# Altium PCB ui-board.PcbDoc
Units mm, origin at the board's own origin, x right, y up, seen from the top; angles counter-clockwise.
Board outline 30.5 x 20 mm, 4 copper layers (Top Layer, Int1 (GND), Int2 (PWR), Bottom Layer), stack 1.369 mm thick; 13 components, 8 nets, 46 pads, 16 vias.
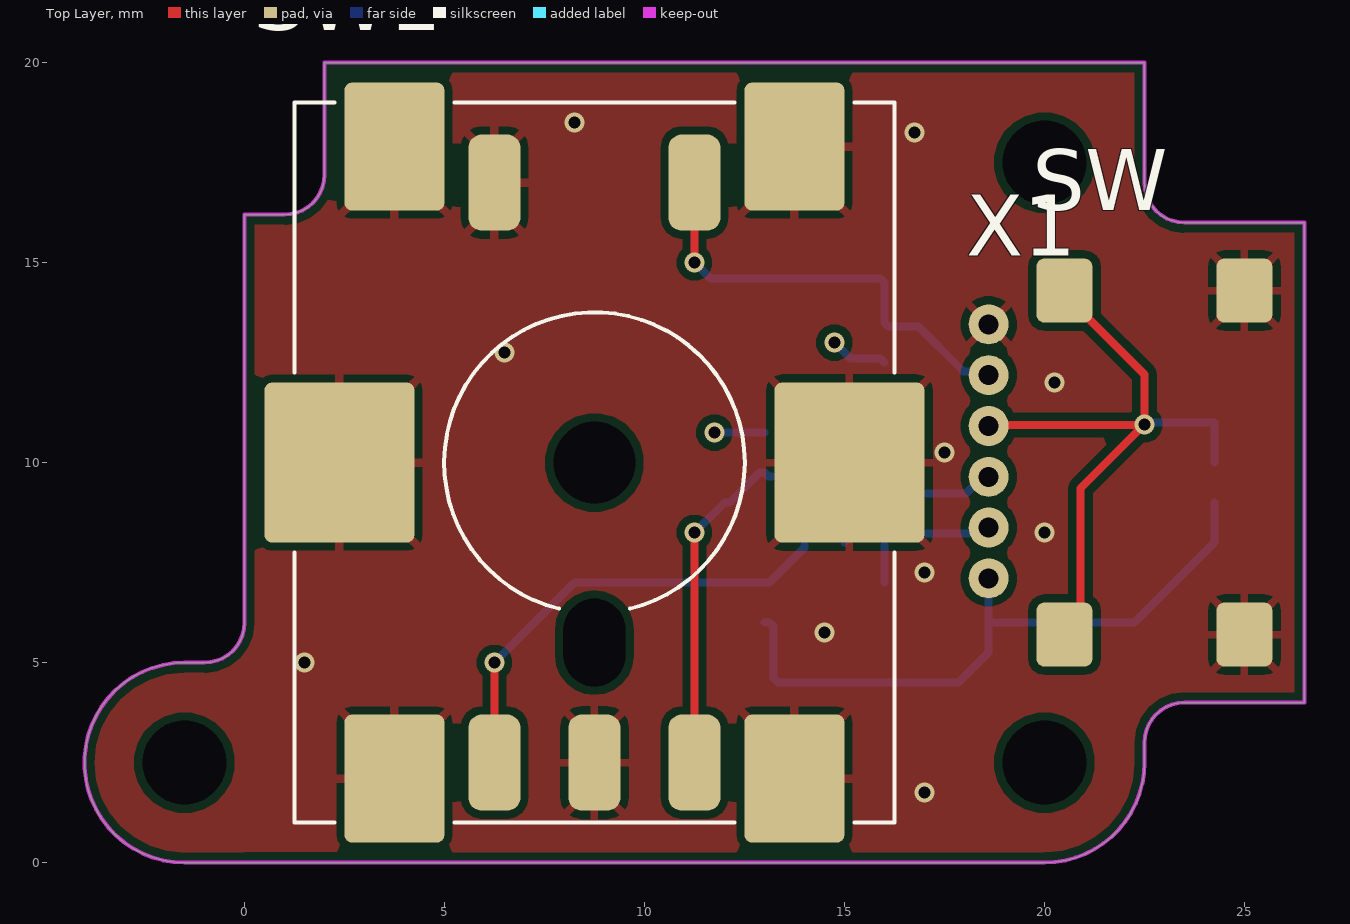
[diagram p0: Top Layer view]
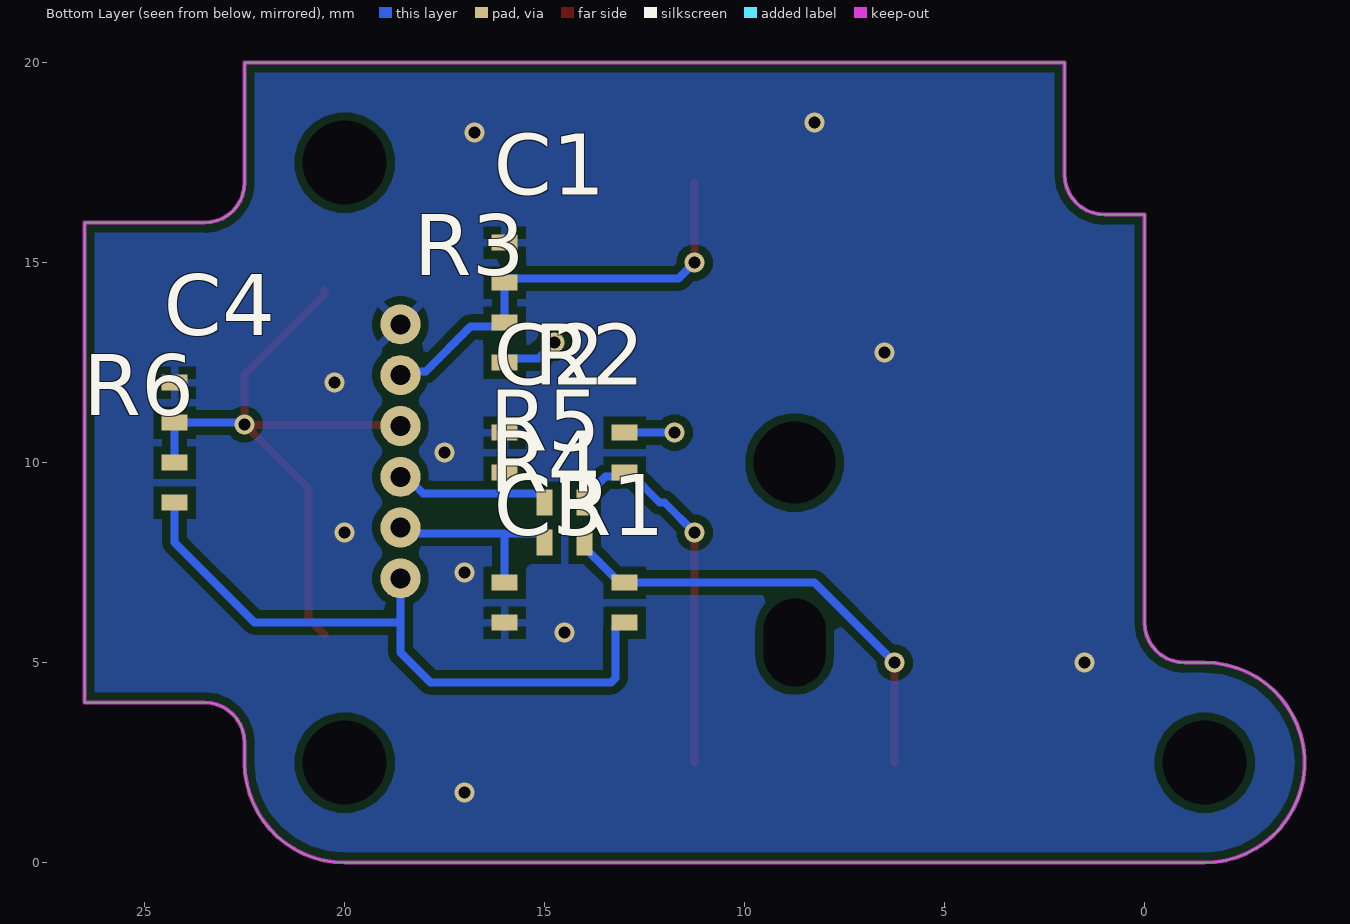
[diagram p1: Bottom Layer view, seen from below]
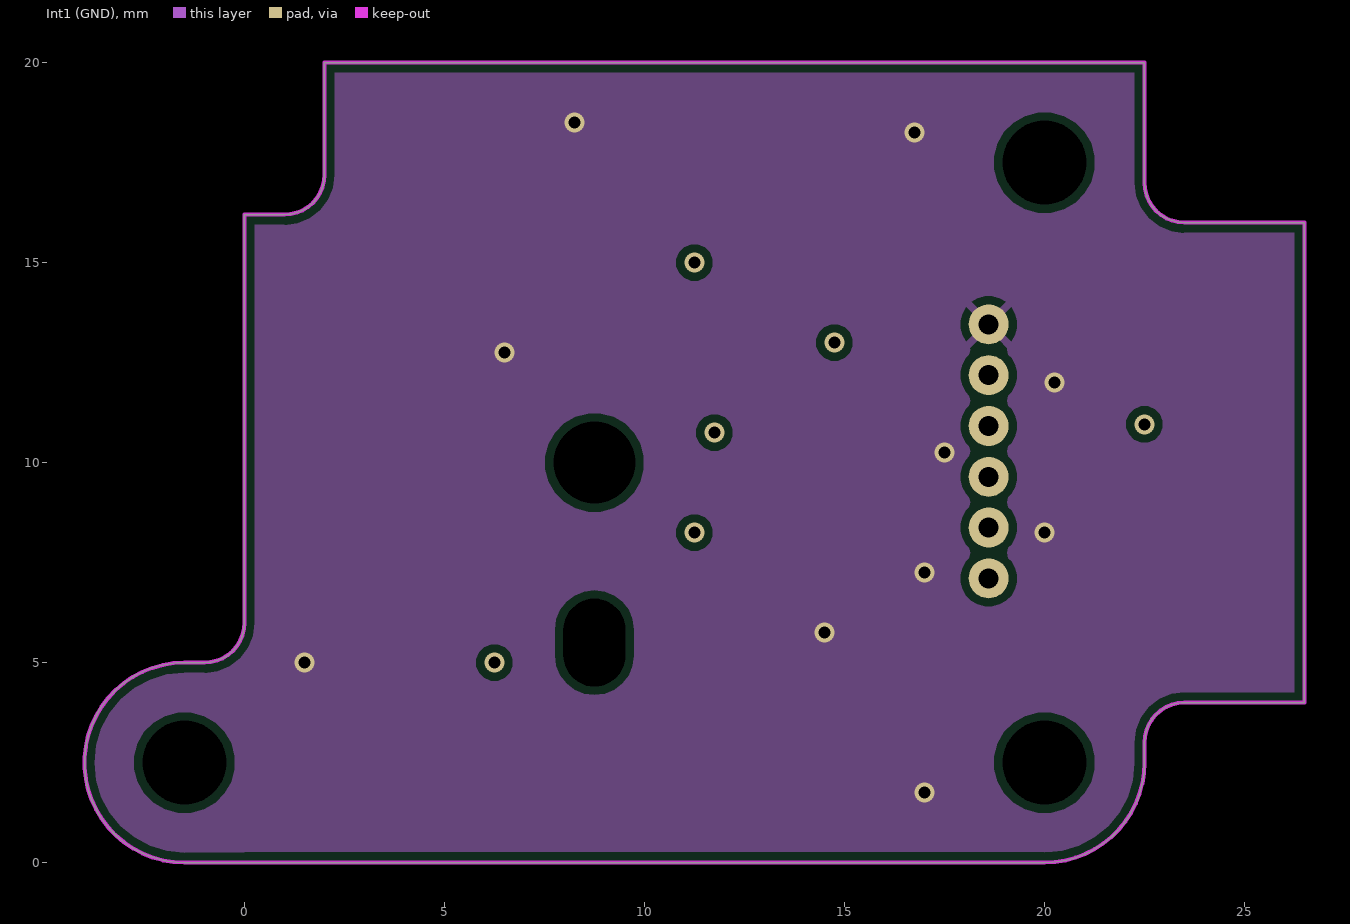
[diagram p2: Int1 (GND)]
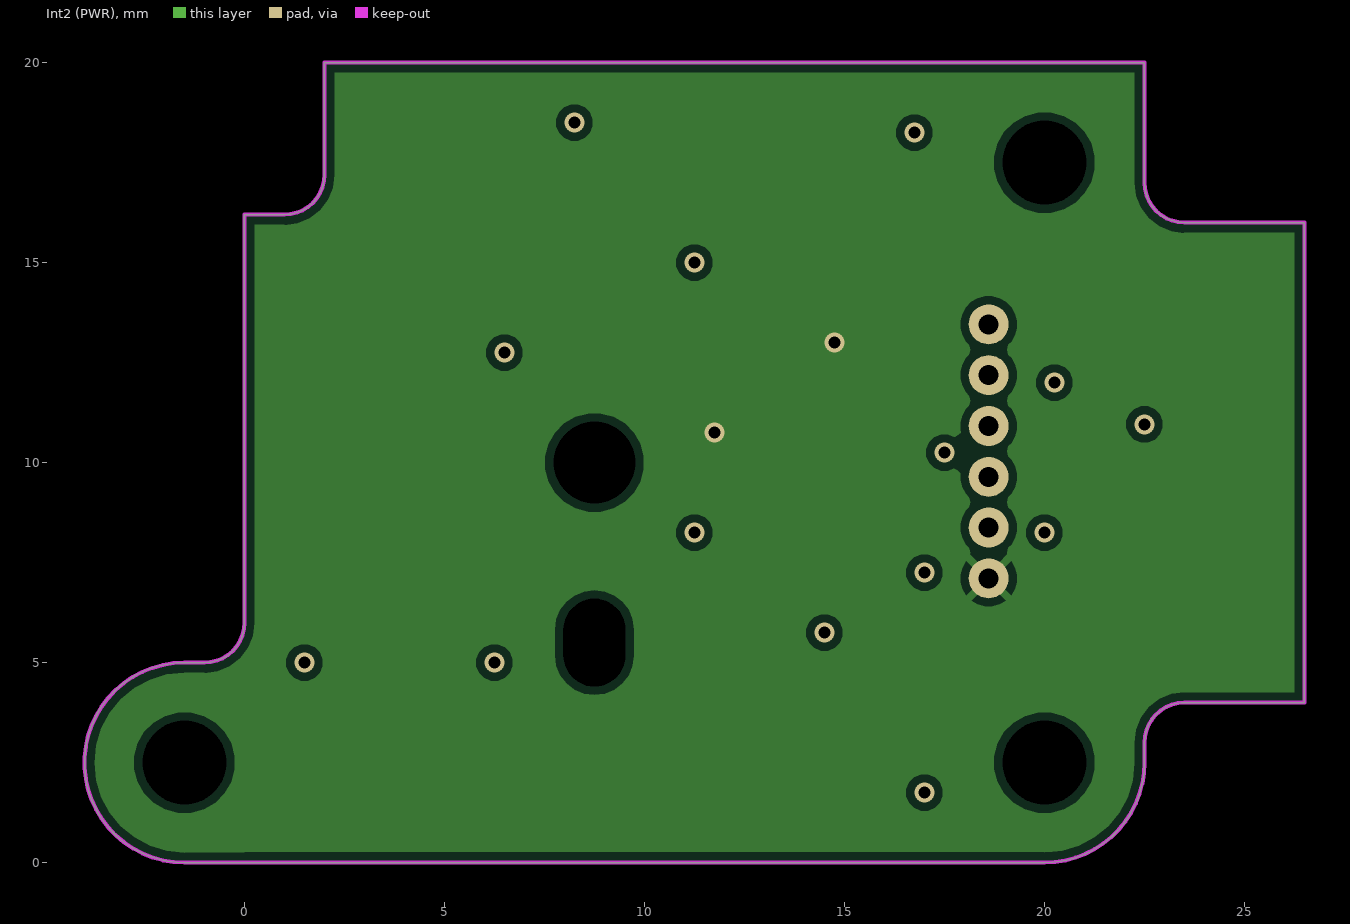
[diagram p3: Int2 (PWR)]
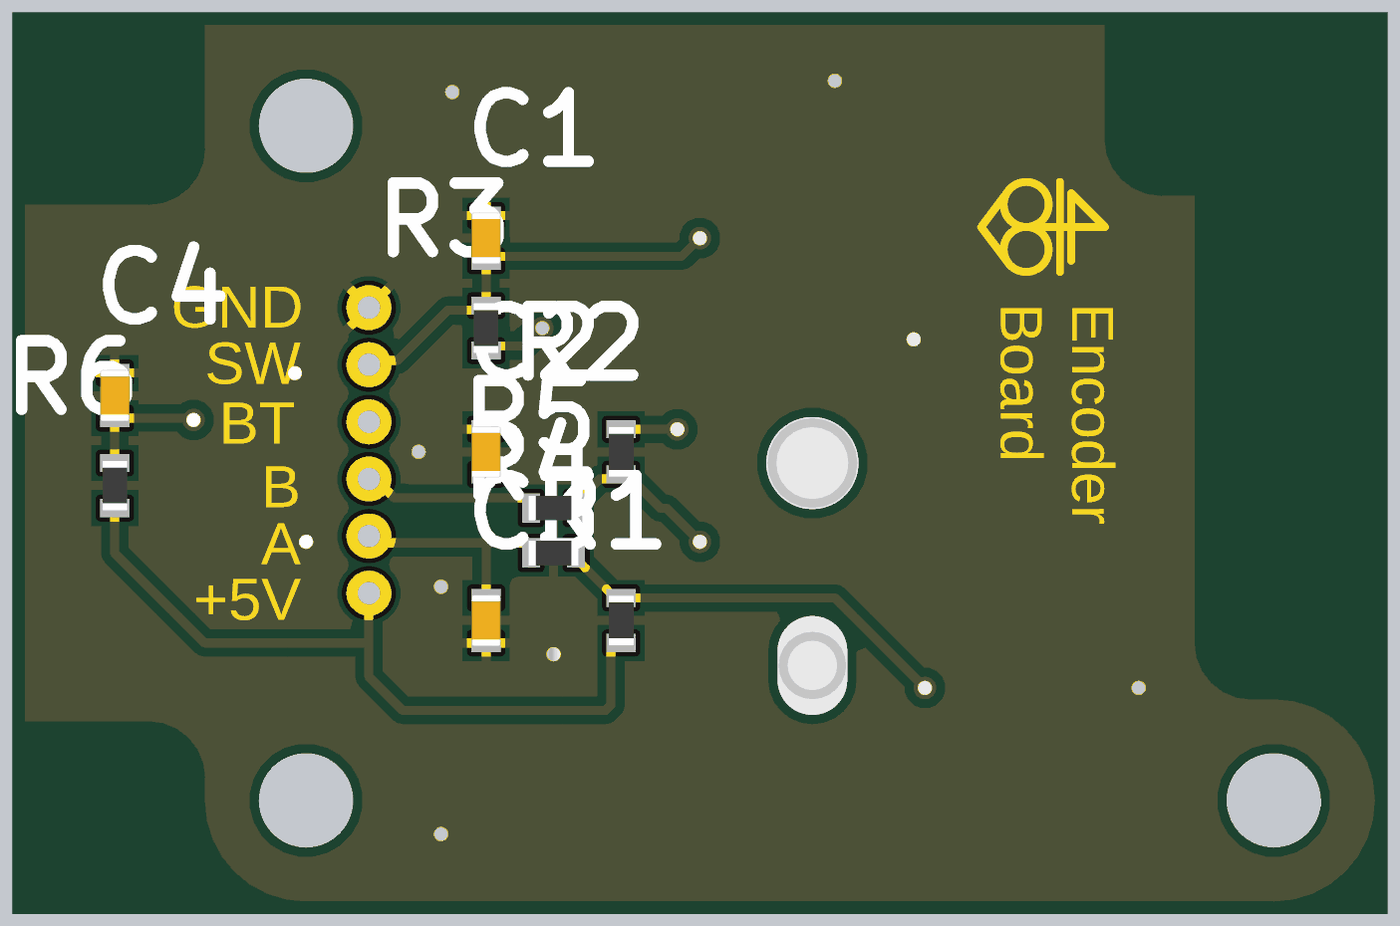
[diagram p4: 3D render of the assembled board from below, using the file's embedded part models]

## Layer stack, top to bottom
Top Solder: solder mask 0.0254, SM-001, Dk 4
Top Layer: signal copper 0.035
Dielectric 1: prepreg 0.1295, PP-017, Dk 4.3
Dielectric 2: prepreg 0.1295, PP-017, Dk 4.3
Int1 (GND): signal copper 0.035
Dielectric 3: core 0.7112, Core-039, Dk 4.8
Int2 (PWR): signal copper 0.035
Dielectric 4: prepreg 0.1295, PP-017, Dk 4.3
Dielectric 5: prepreg 0.1295, PP-017, Dk 4.3
Bottom Layer: signal copper 0.035
Bottom Solder: solder mask 0.0254, SM-001, Dk 4

## Board outline
-1.5,5 -1,5 ccw(c-1,6) 0,6 0,16.2 1,16.2 ccw(c1,17.2) 2,17.2 2,20 22.5,20 22.5,17 ccw(c23.5,17) 23.5,16 26.5,16 26.5,4 23.5,4 ccw(c23.5,3) 22.5,3 22.5,2.496 22.5,2.5 cw(c20,2.5) 20,0 0,0 -1.5,0 cw(c-1.5,2.5)

## Design rules (kind name [scope] priority, off if disabled: settings)
Clearance [All] p1: gap=0.2 ignorepadtopadclearanceinfootprint=FALSE
PolygonConnect [All] p1: thpad.connectstyle=Relief thpad.reliefconductorwidth=0.2 thpad.reliefentries=4 thpad.polygonreliefangle="90 Angle" thpad.airgapwidth=0.2 thpad.conductorbypadedge=TRUE thpad.mindistance=0.381 thpad.enablemindistance=FALSE smdpad.connectstyle=Relief smdpad.reliefconductorwidth=0.2 smdpad.reliefentries=4 smdpad.polygonreliefangle="90 Angle" smdpad.airgapwidth=0.2 smdpad.conductorbypadedge=TRUE smdpad.mindistance=0.381 smdpad.enablemindistance=FALSE via.connectstyle=Direct via.reliefconductorwidth=0.254 via.reliefentries=4 via.polygonreliefangle="90 Angle" via.airgapwidth=0.254
RoutingVias [All] p1: holewidth=0.3 width=0.5 viastyle="Through Hole" minholewidth=0.3 minwidth=0.5 maxholewidth=0.3 maxwidth=0.5
SolderMaskExpansion [All] p1: expansion=0.102 istentingtop=FALSE
SupplyNets "Schematic Supply Nets_3" [InNet('+5')] p1: voltage=0.000
SupplyNets "Schematic Supply Nets_1" [InNet('GND')] p2: voltage=0.000
Width [All] p1: maxlimit=1 minlimit=0.2 preferedwidth=0.25 checkconnectedcopper=TRUE
30 further rules are at their usual default settings.

## Classes and differential pairs
component class "Encoder Board": C1 C2 C3 C4 R1 R2 R3 R4 R5 R6 SW X1

## Components (designator, comment, footprint, x,y, rotation, side; value= is the part's Value field where it differs from the comment)
C1 "33nF" CAP0402 16,15 r270 bottom
C2 "33nF" CAP0402 16,10.25 r270 bottom
C3 "33nF" CAP0402 16,6.5 r90 bottom
C4 "33nF" CAP0402 24.25,11.5 r270 bottom
R1 "10K" RES0402 13,6.5 r270 bottom
R2 "10K" RES0402 13,10.25 r90 bottom
R3 "10K" RES0402 16,13 r270 bottom
R4 "10K" RES0402 14.5,8 r180 bottom
R5 "10K" RES0402 14.5,9 r180 bottom
R6 "10K" RES0402 24.25,9.5 r270 bottom
SW "TS04-66-75-BK-160-SMT" TS04-66-75-BK-160-SMT 22.75,10 r90 top
SW1 "PEC11S-929K-S0015" PEC11S-929K-S0015 8.75,10 r0 top
X1 "3365A/06" 3M_CBL_RIBN_6X 18.604,7.106 r90 top

## Footprints (in the part's own frame and the unit in brackets; to place one, negate y for a bottom-side part, rotate by r counter-clockwise, add the part's x,y. Pads: shape width x height; smd on the part's side, far side on the other; paste and mask are expansions set on the pad)
3M_CBL_RIBN_6X [mm]
  round 1 hole 0.5: 1(0,0) 2(1.27,0) 3(2.54,0) 4(3.81,0) 5(5.08,0) 6(6.35,0)
CAP0402 [mm] "Chip Capacitor, 2-Leads, Body 1.00x0.50mm, IPC Medium Density"
  rect 0.4x0.65 smd: 1(-0.5,0) 2(0.5,0)
  body extent -0.58,-0.33 0.58,0.33, height 0.65
PEC11S-929K-S0015 [mm] "Drehgeber Mechanisch 15 Quadratur (inkremental) Vertikal"
  round 0 hole 1.55 slot 2.2 at 90 deg unplated: 0(0,-4.5)
  round 0 hole 2.05 unplated: 0(0,0)
  rrect50% 1.3x2.4 smd: 1(-2.5,-7.5) 2(0,-7.5) 3(2.5,-7.5) 4(2.5,7) 5(-2.5,7)
  rrect10% 3.75x4 smd: 6(-6.375,0) 6(6.375,0)
  rrect15% 2.5x3.2 smd: 6(-5,-7.9) 6(-5,7.9) 6(5,-7.9) 6(5,7.9)
  silkscreen extent -7.5,-9 7.5,9, body extent -7.5,-9 7.5,9, height 14.11
RES0402 [mm] "Chip Resistor, 2-Leads, Body 1.00x0.50mm, IPC Medium Density"
  rect 0.4x0.65 smd: 1(-0.5,0) 2(0.5,0)
  body extent -0.55,-0.28 0.55,0.28, height 0.4
TS04-66-75-BK-160-SMT [mm] "Tastschalter SPST-Schließer Von oben betätigt Oberflächenmontage"
  rrect28% 1.6x1.4 smd: 1(-4.3,2.25) 1(4.3,2.25) 2(-4.3,-2.25) 2(4.3,-2.25)
  body extent -5,-3 5,3, height 7.61

## Part data
C1 C2 C3 C4: library part C0402C333K4RECTU, MaxVoltage=16, MPN=C0402C333K4RECTU
R1 R2 R3 R4 R5 R6: library part RC0402JR-0710KL, Power=0.063W, Tolerance=5%, MPN=RC0402JR-0710KL
X1: MPN=3365A/06

## Free pads (board coordinates)
  round 1 hole 2.1 unplated: 0(-1.5,2.5) 0(20,2.5) 0(20,17.5)

## Via types
v1: diameter 0.5, hole 0.3, Top Layer to Bottom Layer, tented both sides, 16 vias

## Nets (pads, with @x,y where several pads share a name; then routed paths per layer and width w, separated by ;. In a path a pad name is that pad's centre, name@x,y a point inside that pad or via, vN(x,y) a via of type N, cw(c..) or ccw(c..) an arc to the next point about the centre after c; other vN are vias at no path point)
+5: R1.2 R2.2 R3.2 R6.2 X1.1 | length 19.3
  Bottom Layer w0.2: v1(11.75,10.75) R2.2 ; R1.2 13.125,6 13.225,5.9 13.225,4.617 13.342,4.5 17.85,4.5 18.604,5.254 18.604,6 ; v1(14.75,13) 15.15,12.6 15.9,12.6 R3.2 ; X1.1 18.604,6 ; R6.2 24.25,8 22.25,6 18.604,6
BTN_EN: C4.2 R6.1 SW.1 X1.4 | length 16.9
  Top Layer w0.2: X1.4 18.624,10.937 22.479,10.937 v1(22.5,10.958) ; SW.1@20.5,5.7 20.9,6.1 20.9,9.358 v1(22.5,10.958) ; SW.1@20.5,14.3 20.5,14.2 22.5,12.2 v1(22.5,10.958)
  Bottom Layer w0.2: v1(22.5,10.958) 22.542,11 C4.2 R6.1
GND: C1.1 C2.1 C3.1 C4.1 SW1.2 SW1.5 SW1.6 SW.2 X1.6
  other v1: 17,1.75 1.5,5 14.5,5.75 17,7.25 20,8.25 17.5,10.25 20.25,12 6.5,12.75 16.75,18.25 8.25,18.5
NetR1_1: R1.1 R4.2 SW1.1 | length 11.6
  Top Layer w0.2: SW1.1 v1(6.25,5)
  Bottom Layer w0.2: v1(6.25,5) 8.25,7 13.125,7 13.9,7.775 14,7.875 R4.2
NetR2_1: R2.1 R5.2 SW1.3 | length 9.5
  Top Layer w0.2: SW1.3 v1(11.25,8.25)
  Bottom Layer w0.2: v1(11.25,8.25) 11.999,8.999 12.124,8.999 12.875,9.75 R2.1 13.1,9.65 13.475,9.65 14,9.125 R5.2
SIG_A: C3.2 R4.1 X1.2 | length 5.1
  Bottom Layer w0.2: R4.1 15,8.125 15.1,8.225 16,8.225 ; C3.2 16,8.225 ; X1.2 18.452,8.225 16,8.225
SIG_B: C2.2 R5.1 X1.3 | length 4.5
  Bottom Layer w0.2: R5.1 15,9.125 15.1,9.225 16,9.225 ; C2.2 16,9.225 ; X1.3 18.456,9.646 18.035,9.225 16,9.225
SW: C1.2 R3.1 SW1.4 X1.5 | length 11.1
  Top Layer w0.2: v1(11.25,15) SW1.4
  Bottom Layer w0.2: v1(11.25,15) 11.65,14.6 15.9,14.6 C1.2 R3.1 16.1,13.4 16.85,13.4 17.968,12.282 18.508,12.282 X1.5
pads on no net: SW1.0

## Polygon pours and split planes (outlines as drawn)
GND on Top Layer "GND_L01_P000" (solid, remove dead copper, pour order 0): -1.5,0 22.5,0 22.5,3 cw(c23.5,3) 23.5,4 26.5,4 26.5,16 23.5,16 cw(c23.5,17) 22.5,17 22.5,20 2,20 2,19 cw(c1,19) 1,18 0,18 0,6 cw(c-1,6) -1,5 -1.5,5 ccw(c-1.5,2.5)
GND on Bottom Layer "GND_L04_P002" (solid, remove dead copper, pour order 2): -1.5,0 22.5,0 22.5,3 cw(c23.5,3) 23.5,4 26.5,4 26.5,16 23.5,16 cw(c23.5,17) 22.5,17 22.5,20 2,20 2,19 cw(c1,19) 1,18 0,18 0,6 cw(c-1,6) -1,5 -1.5,5 ccw(c-1.5,2.5)
GND on Int1 (GND) "GND_L02_P003" (solid, remove dead copper, pour order 3): -1.5,0 22.5,0 22.5,3 cw(c23.5,3) 23.5,4 26.5,4 26.5,16 23.5,16 cw(c23.5,17) 22.5,17 22.5,20 2,20 2,19 cw(c1,19) 1,18 0,18 0,6 cw(c-1,6) -1,5 -1.5,5 ccw(c-1.5,2.5)
+5 on Int2 (PWR) "+5_L03_P004" (solid, remove dead copper, pour order 4): -1.5,0 22.5,0 22.5,3 cw(c23.5,3) 23.5,4 26.5,4 26.5,16 23.5,16 cw(c23.5,17) 22.5,17 22.5,20 2,20 2,19 cw(c1,19) 1,18 0,18 0,6 cw(c-1,6) -1,5 -1.5,5 ccw(c-1.5,2.5)

## Keep-outs
Keep-Out Layer:
  lines w0.1: 22.5,2.496 22.5,3 cw(c23.5,3) 23.5,4 26.5,4 26.5,16 23.5,16 cw(c23.5,17) 22.5,17 22.5,20 2,20 2,17.2 cw(c1,17.2) 1,16.2 0,16.2 0,6 cw(c-1,6) -1,5 -1.5,5 ccw(c-1.5,2.5) -1.5,0 0,0 20,0 ccw(c20,2.5) 22.5,2.5

## Silkscreen, mask and mechanical layers (free items; w line width, h text height)
Bottom Solder:
  circle w0.175: c4,15.75 r0.5
  circle w0.175: c4,14.75 r0.5
  lines w0.175: 3,14.5 3,15.25 3,16 2.25,15.25 4,15.25 ; 3.25,14.25 3.25,15.25 3.25,16.25 ; 4.417,14.475 5,15.25 4.417,16.025
  text "Encoder / Board" at 4.75,13.5 h1.5 r90
  text "GND" at 23,13.017 h1.5
  text "SW" at 22.25,11.767 h1.5
  text "BT" at 21.933,10.434 h1.5
  text "B" at 21,9.02 h1.5
  text "A" at 21,7.75 h1.5
  text "+5V" at 22.5,6.517 h1.5
Mechanical 1:
  lines w0.1: 22.5,2.496 22.5,3 cw(c23.5,3) 23.5,4 26.5,4 26.5,16 23.5,16 cw(c23.5,17) 22.5,17 22.5,20 2,20 2,17.2 cw(c1,17.2) 1,16.2 0,16.2 0,6 cw(c-1,6) -1,5 -1.5,5 ccw(c-1.5,2.5) -1.5,0 0,0 20,0 ccw(c20,2.5) 22.5,2.5